# Altium PCB CFD_Chip_Test_v8_needToFixTerminationsAndLayout.PcbDoc (part 2 of 2)
Units mil, origin at the board's own origin, x right, y up, seen from the top; angles counter-clockwise.
Board outline 3180 x 3670 mil, 2 copper layers (Top Layer, Bottom Layer); 101 components, 102 nets, 456 pads, 105 vias.
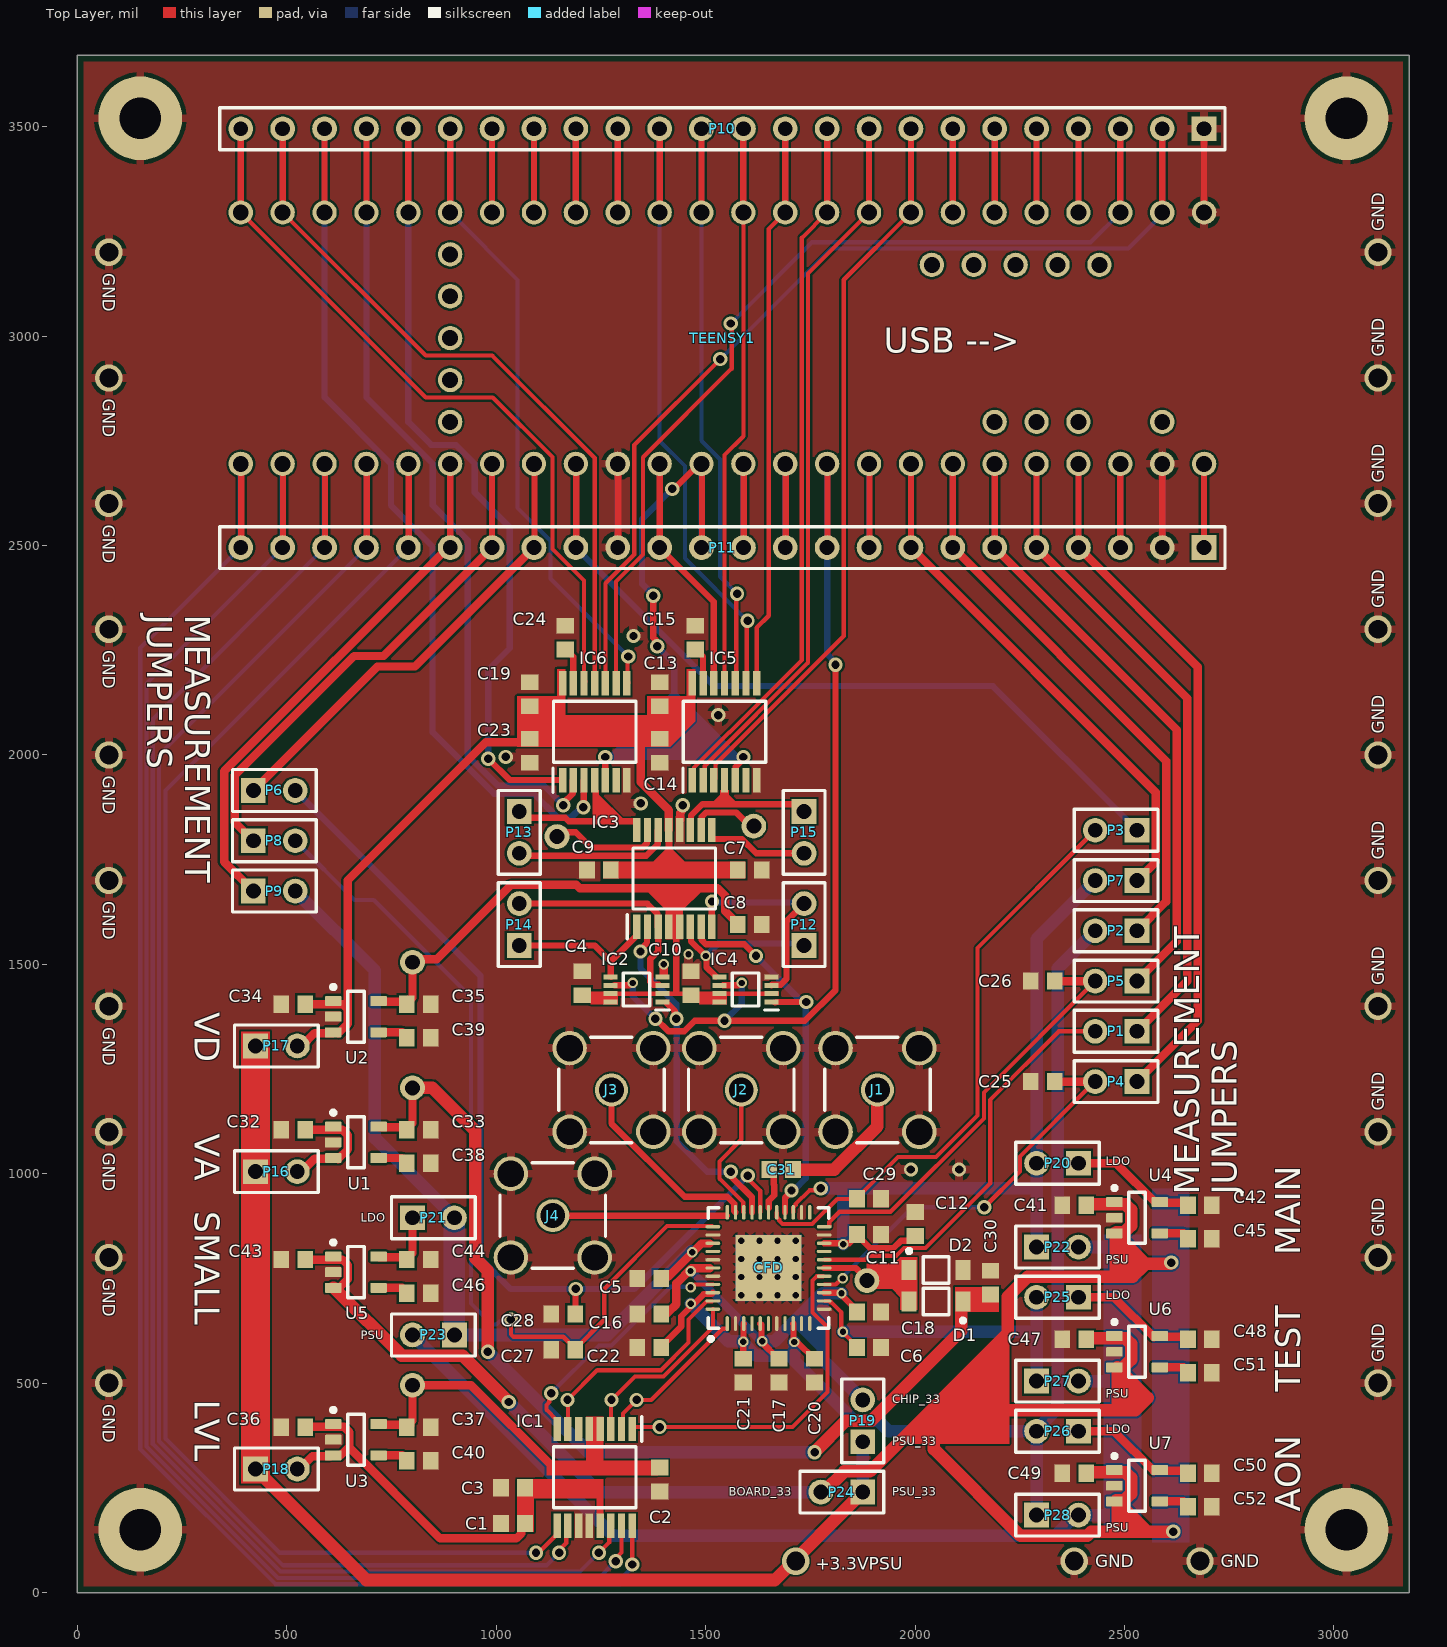
[diagram p0: Top Layer view]

## Silkscreen, mask and mechanical layers (free items; w line width, h text height) (continued)
Top Overlay: (continued)
  text "PSU" at 2455,785 h20
  text "GND" at 60,749.99 h30 r270
  text "LDO" at 2455,700 h20
  text "PSU" at 676.68,605 h20
  text "GND" at 3120,550.01 h30 r90
  text "TEST" at 2919.99,480.04 h60 r90
  text "PSU" at 2455,465 h20
  text "LVL" at 280.01,459.97 h60 r270
  text "CHIP_33" at 1945,451.67 h20
  text "GND" at 60,449.99 h30 r270
  text "LDO" at 2455,380 h20
  text "PSU_33" at 1945,351.67 h20
  text "BOARD_33" at 1555,231.67 h20
  text "PSU_33" at 1945,231.67 h20
  text "AON" at 2919.99,193.4 h60 r90
  text "PSU" at 2455,145 h20
  text "GND" at 2430.01,60 h30
  text "GND" at 2730.01,60 h30
  text "+3.3VPSU" at 1762.54,55 h30